# EAGLE board draft3 (EAGLE 7.6.0)
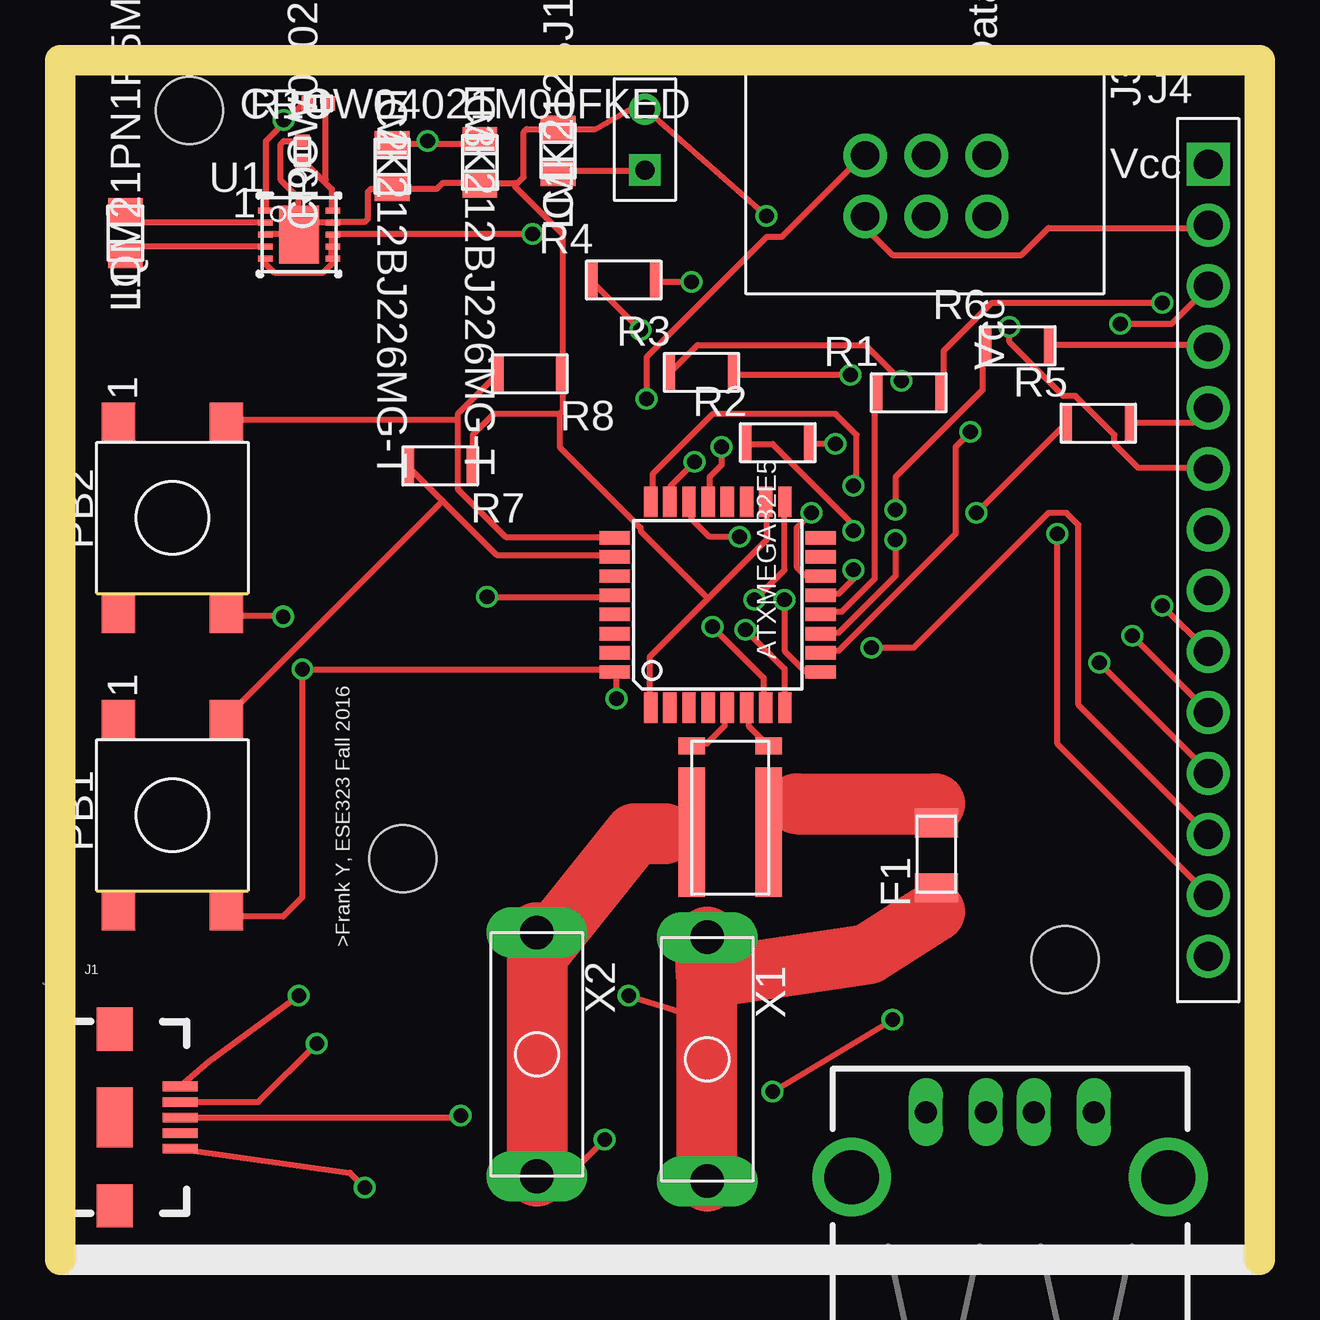
[diagram p0: board, top side]
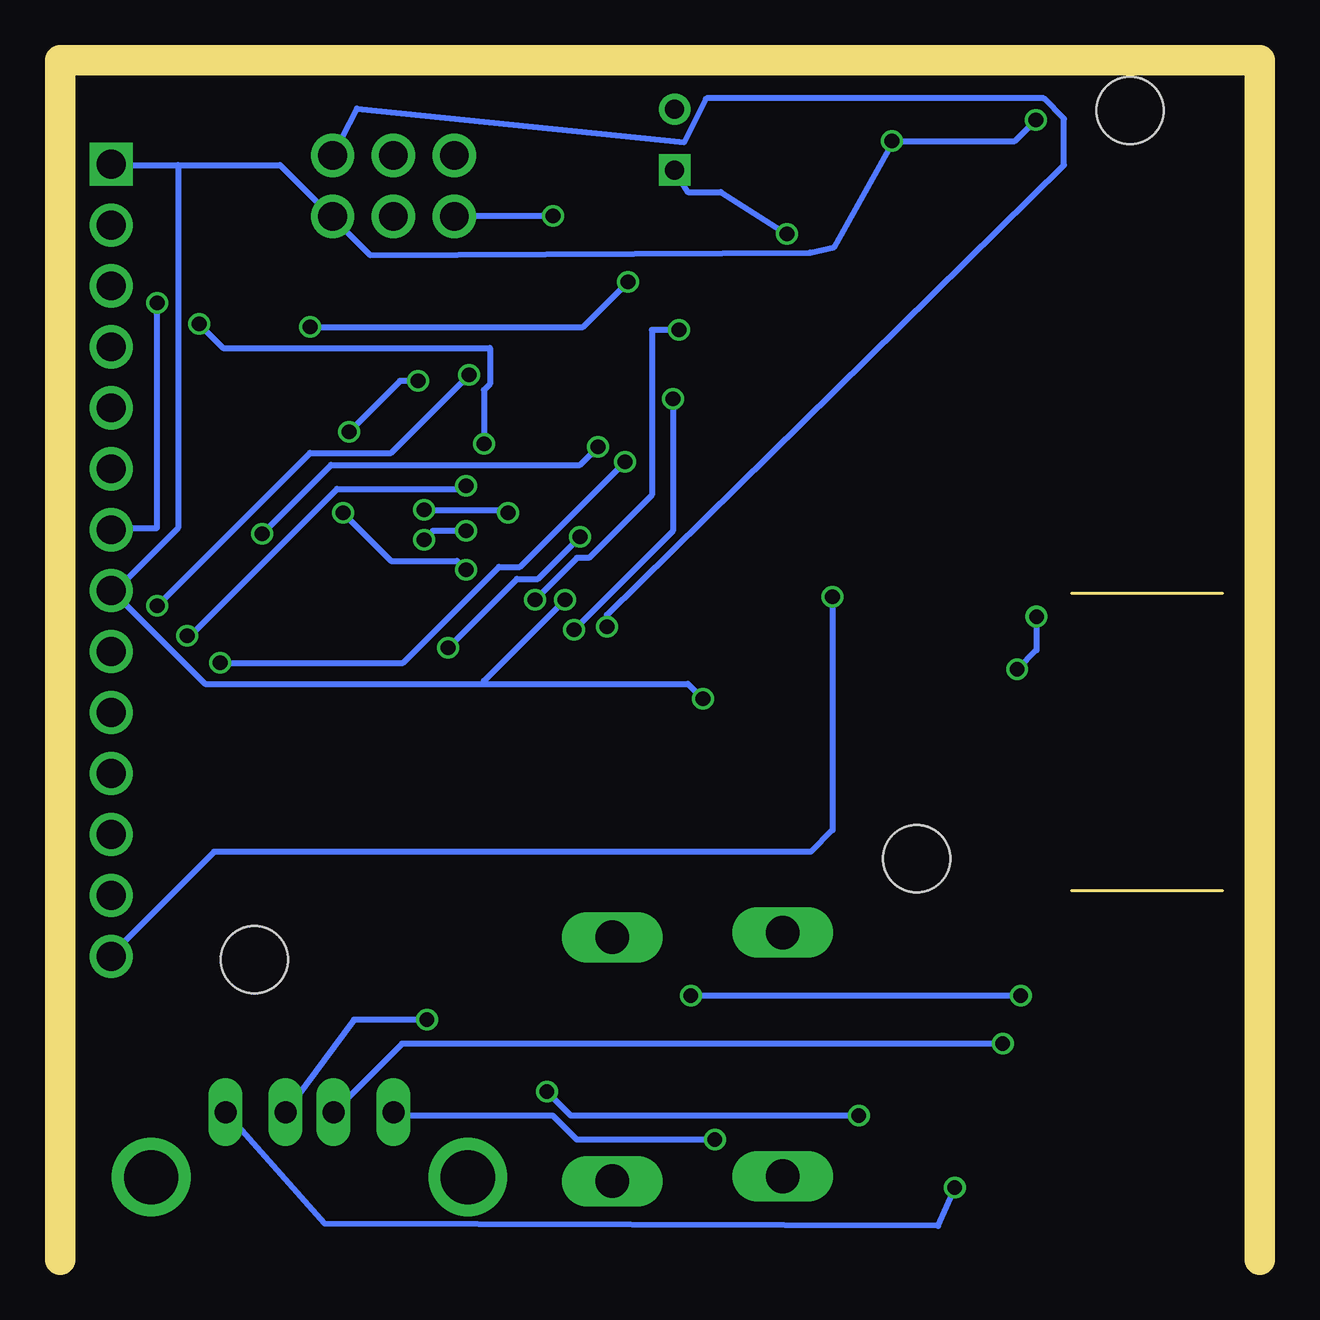
[diagram p1: board, bottom side, seen from below]

Size 50 x 50 mm. Coordinates in mm from the lower left corner, seen from the top.
Outline: 50,0 50,50 0,50 0,0
Copper layers (1*16): Top 0.035mm / dielectric 1.5mm / Bottom 0.035mm
Design rules "SeeedStudio_2layer_DRU_no_angle_20140221": minimum track width 6mil, minimum drill 12mil, track to track 6mil, track to pad 6mil, pad to pad 6mil, via to via 6mil, smd to smd 0mil, copper to edge 10mil, drill to drill 10mil, minimum pad ring 10mil, minimum via ring 6mil, stop-mask expansion 2mil, vias tented up to drill 100mil, thermal gap 10mil
Holes 2.8 mm at 5.4,47.9 41.9,12.5 14.3,16.7

## Footprints (pad centres in the part's own frame; a part is rotated, then mirrored left to right if it is on the bottom)
TQFP32-08 = smd 1.27 x 0.559: 1 -4.293,2.8; 2 -4.293,2; 3 -4.293,1.2; 4 -4.293,0.4; 5 -4.293,-0.4; 6 -4.293,-1.2; 7 -4.293,-2; 8 -4.293,-2.8; 17 4.293,-2.8; 18 4.293,-2; 19 4.293,-1.2; 20 4.293,-0.4; 21 4.293,0.4; 22 4.293,1.2; 23 4.293,2; 24 4.293,2.8 | smd 0.559 x 1.27: 9 -2.8,-4.293; 10 -2,-4.293; 11 -1.2,-4.293; 12 -0.4,-4.293; 13 0.4,-4.293; 14 1.2,-4.293; 15 2,-4.293; 16 2.8,-4.293; 25 2.8,4.293; 26 2,4.293; 27 1.2,4.293; 28 0.4,4.293; 29 -0.4,4.293; 30 -1.2,4.293; 31 -2,4.293; 32 -2.8,4.293
0805 = smd 1.118 x 1.448: 1 -0.902,0; 2 0.902,0
BELFUSE-C1Q5 = smd 1.2 x 1.8: P$1 0.2,-0.8; P$2 2.9,-0.8
USB-B-MICRO-SMD_V03 = smd 1.45 x 0.4: D+ 2.725,0; D- 2.725,0.65; GND 2.725,-1.3; ID 2.725,-0.65; VBUS 2.725,1.3 | smd 1.5 x 1.8: SHIELD1 0,3.685; SHIELD2 0,-3.685 | smd 1.5 x 2.5: SHIELD3 0,0
87520 = drill 0.914 long: 1 -3.5,2.71; 2 -1,2.71; 3 1,2.71; 4 3.5,2.71 | drill 2.261: S1 -6.6,0; S2 6.6,0
JTAG6 = drill 1.2: CLK -1.27,-6.14; DATA -1.27,-1.06; GND 1.27,-6.14; NC1 -1.27,-3.6; NC2 1.27,-3.6; VCC 1.27,-1.06
TFTLCD = drill 1.2: CS 0,7.62; D/C 0,2.54; GND 0,10.16; LED 0,-5.08; MISO 0,-7.62; MOSI 0,0; RST 0,5.08; SCK 0,-2.54; T_CLK 0,-10.16; T_CS 0,-12.7; T_DIN 0,-15.24; T_DO 0,-17.78; T_IRQ 0,-20.32 | drill 1.2 square: VCC 0,12.7
PB-B3FS-1010P = smd 1.6 x 1.4: P$1 4,2.25; P$2 4,-2.25; P$3 -4,-2.25; P$4 -4,2.25
RC1206 = smd 0.5 x 1.6: P$1 -1.4,0; P$2 1.3,0
0402 = smd 0.559 x 0.61: 1 -0.419,0; 2 0.419,0
RESISTOR_4PIN = smd 1.1 x 5.4: I_IN 1.6,-0.2; I_OUT -1.6,-0.2 | smd 1.1 x 0.7: V+ 1.6,3.4; V- -1.6,3.4
DRC0010J = smd 0.6 x 0.24: 1 -1.4,1; 2 -1.4,0.5; 3 -1.4,0; 4 -1.4,-0.5; 5 -1.4,-1; 6 1.4,-1; 7 1.4,-0.5; 8 1.4,0; 9 1.4,0.5; 10 1.4,1 | smd 1.65 x 2.4: 11 0,0
BATTERYHOLDER = drill 0.8: BATGND 0,-1.27 | drill 0.8 square: BATVCC 0,1.27
CINCH-BANANA = drill 1.4 long: P$1 -5.08,0; P$2 5.08,0

## Placement (x,y rotation side)
ATXMEGA32E5  U2  [TQFP32-08]  27.42,27.29 90 top
C1  LMK212BJ106KG-T  [0805]  20.76,46.21 90 top
C2  LMK212BJ226MG-T  [0805]  13.84,45.57 270 top
C3  LMK212BJ226MG-T  [0805]  17.5,45.73 270 top
F1  BELFUSE-C1Q5  [BELFUSE-C1Q5]  35.73,15.3 90 top
I1  LQM21PN1R5MC0D  [0805]  2.73,42.78 90 top
J1  USB-MICROB"  [USB-B-MICRO-SMD_V03]  2.29,5.92 0 top
J2  87520  [87520]  39.6,3.43 0 top
J3  JTAG-6  [JTAG6]  39.7,44.75 270 top
J4  TFTLCDTFTLCD-DEV  [TFTLCD]  47.86,32.96 0 top
PB1  PB-B3FS-1010P  [PB-B3FS-1010P]  4.69,18.52 90 top
PB2  PB-B3FS-1010P  [PB-B3FS-1010P]  4.69,30.92 90 top
R1  1k  [RC1206]  35.43,36.13 0 top
R2  1k  [RC1206]  29.97,34.05 0 top
R3  1k  [RC1206]  26.79,36.98 0 top
R4  1k  [RC1206]  23.55,40.83 0 top
R5  1k  [RC1206]  43.33,34.86 0 top
R6  1k  [RC1206]  39.97,38.09 0 top
R7  1k  [RC1206]  15.8,33.08 180 top
R8  1k  [RC1206]  19.53,36.92 180 top
R9  CRCW0402178KFKED  [0402]  10.11,46.18 90 top
R10  CRCW04021M00FKED  [0402]  10.77,48.18 0 top
R11  RESISTOR_4PIN  [RESISTOR_4PIN]  27.94,18.01 0 top
U1  TPS63000DRCR  [DRC0010J]  9.97,42.72 0 top
U$12  BATTERYHOLDER  [BATTERYHOLDER]  24.38,46.68 180 top
X1  CINCH-BANANA  [CINCH-BANANA]  26.98,8.35 270 top
X2  CINCH-BANANA  [CINCH-BANANA]  19.88,8.55 270 top

## Library data of the parts
ATXMEGA32E5 = ese323
C1-C3 = 00ese323; MANUFACTURER_NAME: Taiyo Yuden; VENDOR: Taiyo Yuden
F1 J2-J4 PB1 PB2 R1-R8 R11 U$12 X1 X2 = 00ese323
I1 = 00ese323; MANUFACTURER_NAME: MuRata; VENDOR: MuRata
J1 = 00ese323; PROD_ID: CONN-11752
R9 R10 = 00ese323; MANUFACTURER_NAME: Vishay-Dale; VENDOR: Vishay-Dale
U1 = 00ese323; MANUFACTURER_NAME: Texas Instruments; MANUFACTURER_PART_NUMBER: TPS63000DRCR

## Nets
3.3V: ATXMEGA32E5.17 ATXMEGA32E5.32 C2.1 C3.1 J3.VCC J4.LED J4.VCC PB1.P$3 PB2.P$3 R10.1 U1.1
3V: C1.1 U1.5 U1.6 U1.7 U1.8 U$12.BATVCC
GND: ATXMEGA32E5.1 ATXMEGA32E5.18 C1.2 C2.2 C3.2 J3.GND J4.GND R7.P$1 R8.P$1 R9.2 U1.3 U1.9 U1.11 U$12.BATGND
N$1: ATXMEGA32E5.7 J3.DATA
N$2: ATXMEGA32E5.8 J3.CLK
N$3: ATXMEGA32E5.9 R4.P$1
N$4: ATXMEGA32E5.10 R3.P$1
N$5: ATXMEGA32E5.11 R2.P$1
N$6: ATXMEGA32E5.12 R1.P$1
N$7: J4.MOSI R4.P$2
N$8: J4.MISO R3.P$2
N$9: J4.SCK R1.P$2
N$10: J4.CS R2.P$2
N$11: ATXMEGA32E5.14 R6.P$1
N$12: J4.RST R6.P$2
N$13: ATXMEGA32E5.13 R5.P$1
N$14: J4.D/C R5.P$2
N$15: ATXMEGA32E5.28 J4.T_IRQ
N$16: ATXMEGA32E5.21 J4.T_DO
N$17: ATXMEGA32E5.22 J4.T_DIN
N$18: ATXMEGA32E5.23 J4.T_CS
N$19: ATXMEGA32E5.24 J4.T_CLK
N$20: ATXMEGA32E5.26 PB1.P$2 R7.P$2
N$21: ATXMEGA32E5.25 PB2.P$2 R8.P$2
N$22: ATXMEGA32E5.6 R11.V+
N$23: ATXMEGA32E5.5 R11.V-
N$24: F1.P$1 J1.VBUS X1.P$1 X1.P$2
N$25: F1.P$2 R11.I_IN
N$26: J1.GND J2.4
N$28: J1.D+ J2.3
N$29: J1.D- J2.2
N$30: J2.1 R11.I_OUT X2.P$1 X2.P$2
N$31: I1.1 U1.4
N$32: I1.2 U1.2
N$34: R9.1 R10.2 U1.10

## Tracks (layer width: path | path; a pad name or v marks a point on that pad's centre or on a via)
3.3V  (via drill 0.6, 0.61)
  Top 0.254: v23.2,23.38 23.2,24.38 ATXMEGA32E5.32 23.02,24.6 v10.1,24.6 10.1,15.1 9.3,14.3 7.16,14.3 PB1.P$3 | v28.95,27.5 30.2,28.75 30.2,31.5 ATXMEGA32E5.17 | 9.39,47.44 10.08,48.12 10.33,48.12 R10.1 | 9.39,47.44 8.58,46.62 8.58,43.75 U1.1 | 15.33,46.5 17.33,46.5 17.45,46.62 C3.1 | 15.33,46.5 13.95,46.5 C2.1 | v9.33,47.5 9.39,47.44 | v15.33,46.62 15.33,46.5 | PB2.P$3 6.94,26.84 9.26,26.84 v9.3,26.8
  Bottom 0.254: v23.2,23.38 23.83,24 32.33,24 | 32.33,24 43.95,24 47.83,27.88 J4.LED 47.7,27.88 45.08,30.5 45.08,45.62 | v28.95,27.5 32.33,24.12 32.33,24 | v9.33,47.5 10.2,46.62 v15.33,46.62 15.33,46.5 17.73,42.2 18.73,41.98 37.08,41.88 38.58,43.38 J3.VCC 38.7,43.5 40.83,45.62 45.08,45.62 | 45.08,45.62 47.83,45.62 J4.VCC | v9.3,26.8 9.3,25.4 v10.1,24.6
3V  (via drill 0.61)
  Top 0.254: U1.5 8.58,41.62 8.58,41.5 8.95,41.12 10.95,41.12 11.45,41.62 U1.6 11.33,41.75 11.33,42.12 U1.7 11.33,42.25 11.33,42.62 U1.8 11.45,42.75 v19.7,42.75 | C1.1 20.83,45.38 24.4,45.38 24.33,45.5 U$12.BATVCC
  Bottom 0.254: v19.7,42.75 22.45,44.5 23.83,44.5 U$12.BATVCC
GND  (via drill 0.61)
  Top 0.254: 27.01,27.56 29.45,30 29.45,31.5 ATXMEGA32E5.18 | 27.01,27.56 24.58,25.12 24.58,23 ATXMEGA32E5.1 | R7.P$1 17.2,34.38 18.08,35.25 20.83,35.25 | 20.83,35.25 20.95,35.38 20.95,36.88 R8.P$1 20.95,37 20.95,42.75 18.95,44.75 18.95,44.88 | U1.3 8.58,42.75 9.83,42.75 9.95,42.88 10.08,42.75 U1.11 | U1.11 9.95,43 9.95,43.25 11.33,43.25 U1.9 11.45,43.25 12.7,43.25 12.83,43.38 12.83,44.5 12.95,44.62 13.83,44.62 C2.2 13.95,44.62 15.7,44.62 15.95,44.88 17.45,44.88 C3.2 17.58,44.88 18.95,44.88 | R9.2 10.08,46.62 9.33,46.62 9.2,46.5 9.2,45 9.95,44.25 9.95,43.38 U1.11 | 18.95,44.88 19.08,44.88 19.33,45.12 19.33,47 19.45,47.12 20.7,47.12 C1.2 20.83,47.12 22.33,47.12 23.7,47.9 24.33,47.9 U$12.BATGND 24.45,47.9 v29.45,43.5 | J4.GND 47.83,43 41.2,43 40.08,41.88 34.7,41.88 33.58,43 33.58,43.38 J3.GND | 27.01,27.56 24.2,30.38 24.2,30.5 20.83,33.88 20.83,35.25
  Bottom 0.254: v29.45,43.5 33.45,43.5 J3.GND
N$1  (via drill 0.61)
  Top 0.254: v27.2,26.38 29.33,24.25 29.33,23 ATXMEGA32E5.7
  Bottom 0.254: v27.2,26.38 27.2,26.88 8.15,45.62 8.15,47.55 9,48.4 23.05,48.4 23.08,48.38 23.98,46.58 37.62,47.98 38.58,46.12 J3.DATA
N$2  (via drill 0.61)
  Top 0.254: v28.58,26.25 30.2,24.62 30.2,23 ATXMEGA32E5.8 | v24.45,35.88 24.45,37.62 29.45,42.62 30.08,42.62 33.45,46 J3.CLK
  Bottom 0.254: v28.58,26.25 24.45,30.38 v24.45,35.88
N$3  (via drill 0.61)
  Top 0.254: v30.2,27.5 30.2,25.38 31.08,24.5 ATXMEGA32E5.9 | v24.2,38.75 22.2,40.75 R4.P$1
  Bottom 0.254: v30.2,27.5 28.45,29.25 27.95,29.25 25.33,31.88 25.33,38.75 v24.2,38.75
N$4  (via drill 0.61)
  Top 0.254: v37.95,34.5 37.33,33.88 37.33,30.25 32.45,25.38 31.83,25.38 ATXMEGA32E5.10 | v35.08,36.62 33.58,38.12 26.58,38.12 25.45,37 R3.P$1
  Bottom 0.254: v37.95,34.5 35.83,36.62 v35.08,36.62
N$5  (via drill 0.61)
  Top 0.254: v34.83,30 34.83,28.5 32.45,26.12 31.83,26.12 ATXMEGA32E5.11 | v33.08,30.38 33.08,30.62 29.7,34 28.58,34 R2.P$1
  Bottom 0.254: v34.83,30 34.45,30.38 v33.08,30.38
N$6
  Top 0.254: ATXMEGA32E5.12 31.83,27 32.58,27 33.95,28.38 33.95,36.12 R1.P$1
N$7  (via drill 0.61)
  Top 0.254: v26.33,40.75 24.95,40.75 R4.P$2 | v39.58,38.88 39.58,38.25 41.83,36 42.33,36 43.95,34.38 43.95,34 44.95,33 47.83,33 J4.MOSI
  Bottom 0.254: v26.33,40.75 28.2,38.88 v39.58,38.88
N$8  (via drill 0.61)
  Top 0.254: v32.95,36.88 28.2,36.88 R3.P$2 | J4.MISO v45.95,27.25
  Bottom 0.254: v32.95,36.88 36.2,33.62 39.58,33.62 v45.95,27.25
N$9  (via drill 0.61)
  Top 0.254: v45.95,39.88 38.83,39.88 36.83,37.88 36.83,36.25 R1.P$2
  Bottom 0.254: v45.95,39.88 45.95,30.5 47.83,30.5 J4.SCK
N$10  (via drill 0.61)
  Top 0.254: v32.33,34 31.33,34 R2.P$2 | v44.2,39 46.33,39 47.83,40.5 J4.CS
  Bottom 0.254: v32.33,34 32.33,36.25 32.08,36.5 32.08,38 43.2,38 v44.2,39
N$11  (via drill 0.61)
  Top 0.254: v31.33,31.12 30.7,30.5 30.7,28.88 31.08,28.5 ATXMEGA32E5.14 | v34.83,31.25 34.83,32.62 38.45,36.25 38.45,38 R6.P$1
  Bottom 0.254: v31.33,31.12 31.45,31.25 v34.83,31.25
N$12
  Top 0.254: R6.P$2 41.33,38.12 47.83,38.12 J4.RST
N$13  (via drill 0.61)
  Top 0.254: v33.08,28.75 33.08,28.38 32.45,27.75 31.83,27.75 ATXMEGA32E5.13 | v38.2,31.12 41.83,34.75 R5.P$1
  Bottom 0.254: v33.08,28.75 33.45,29.12 36.2,29.12 v38.2,31.12
N$14
  Top 0.254: R5.P$2 44.7,34.88 47.2,34.88 47.83,35.5 J4.D/C
N$15  (via drill 0.61)
  Top 0.254: v17.8,27.62 23.08,27.62 ATXMEGA32E5.28
  Bottom 0.254: J4.T_IRQ 47.83,12.75 43.58,17 18.7,17 17.8,17.9 v17.8,27.62
N$16  (via drill 0.61)
  Top 0.254: v27.58,33.88 27.58,33.12 27.08,32.62 27.08,31.62 ATXMEGA32E5.21 | v41.58,30.25 41.58,21.5 47.83,15.25 J4.T_DO
  Bottom 0.254: v27.58,33.88 28.33,33.12 38.7,33.12 v41.58,30.25
N$17  (via drill 0.61)
  Top 0.254: v28.33,30.12 27.08,30.12 26.33,30.88 26.33,31.5 ATXMEGA32E5.22 | v33.83,25.5 35.58,25.5 41.2,31.12 41.95,31.12 42.45,30.62 42.45,23.12 47.83,17.75 J4.T_DIN
  Bottom 0.254: v28.33,30.12 30.08,28.38 30.95,28.38 v33.83,25.5
N$18  (via drill 0.61)
  Top 0.254: v26.45,33.25 25.45,32.25 25.45,31.62 ATXMEGA32E5.23 | v43.33,24.88 47.83,20.38 J4.T_CS
  Bottom 0.254: v26.45,33.25 30.83,28.88 31.7,28.88 35.7,24.88 v43.33,24.88
N$19  (via drill 0.61)
  Top 0.254: v33.08,32.25 33.2,32.38 33.2,34.38 32.33,35.25 27.2,35.25 24.7,32.75 24.7,31.62 ATXMEGA32E5.24 | v44.7,26 47.83,22.88 J4.T_CLK
  Bottom 0.254: v33.08,32.25 33.2,32.12 38.45,32.12 44.58,26 v44.7,26
N$20
  Top 0.254: 15.95,31.62 14.58,33 R7.P$2 | 15.95,31.62 18.2,29.38 23.08,29.38 ATXMEGA32E5.26 | 15.95,31.62 6.95,22.62 PB1.P$2
N$21
  Top 0.254: 16.58,35 16.58,35.25 18.2,36.88 R8.P$2 | 16.58,35 16.58,32.12 18.58,30.12 23.08,30.12 ATXMEGA32E5.25 | 16.58,35 6.95,35 PB2.P$2
N$22
  Top 0.254: R11.V+ 28.7,22.25 28.7,22.88 ATXMEGA32E5.6
N$23
  Top 0.254: R11.V- 26.45,21.5 26.95,21.5 27.7,22.25 27.7,22.88 ATXMEGA32E5.5
N$24  (via drill 0.6)
  Top 0.254: v9.95,11 6.2,8.25 J1.VBUS | 36.45,14.5 F1.P$1 | v23.7,11 26.95,10
  Top 2.54: 36.45,14.5 33.7,12.75 26.95,11.75 | 26.95,11.75 26.95,10 26.95,4.64 X1.P$2 | 26.95,11.75 26.9,12.75 X1.P$1
  Bottom 0.254: v9.95,11 v23.7,11
N$25
  Top 0.254: 29.45,17.88 R11.I_IN 30.7,19 | 36.45,19 F1.P$2
  Top 2.54: 30.7,19 36.45,19
N$26  (via drill 0.6)
  Top 0.254: J1.GND 12.08,3.62 v12.7,3
  Bottom 0.254: J2.4 38.96,1.5 13.4,1.4 v12.7,3
N$28  (via drill 0.6)
  Top 0.254: v29.7,7 v34.7,10 | J1.D+ 16.62,5.92 v16.7,6
  Bottom 0.254: v16.7,6 28.7,6 v29.7,7 | v34.7,10 37.74,10 J2.3
N$29  (via drill 0.6)
  Top 0.254: J1.D- 8.27,6.57 v10.7,9
  Bottom 0.254: v10.7,9 35.74,9 J2.2
N$30  (via drill 0.6)
  Top 0.254: 19.95,12.75 X2.P$1 | 25.2,17.75 R11.I_OUT | X2.P$2 20.17,2.47 v22.7,5
  Top 2.54: 19.95,12.75 23.95,17.75 25.2,17.75 | X2.P$1 X2.P$2
  Bottom 0.254: J2.1 35.95,6 29.45,6 28.45,5 v22.7,5
N$31
  Top 0.254: U1.4 8.45,42.25 3.08,42.25 2.83,42 I1.1
N$32
  Top 0.254: U1.2 8.45,43.25 3.2,43.25 2.83,43.62 I1.2
N$34
  Top 0.254: 11.01,44.94 10.2,45.75 R9.1 | 11.01,44.94 11.33,44.62 11.33,43.75 U1.10 | R10.2 11.08,48.12 11.08,45 11.01,44.94

## Text on the board
tSilk: >Frank Y, ESE323 Fall 2016